# EAGLE board TeamFlag (EAGLE 7.6.0)
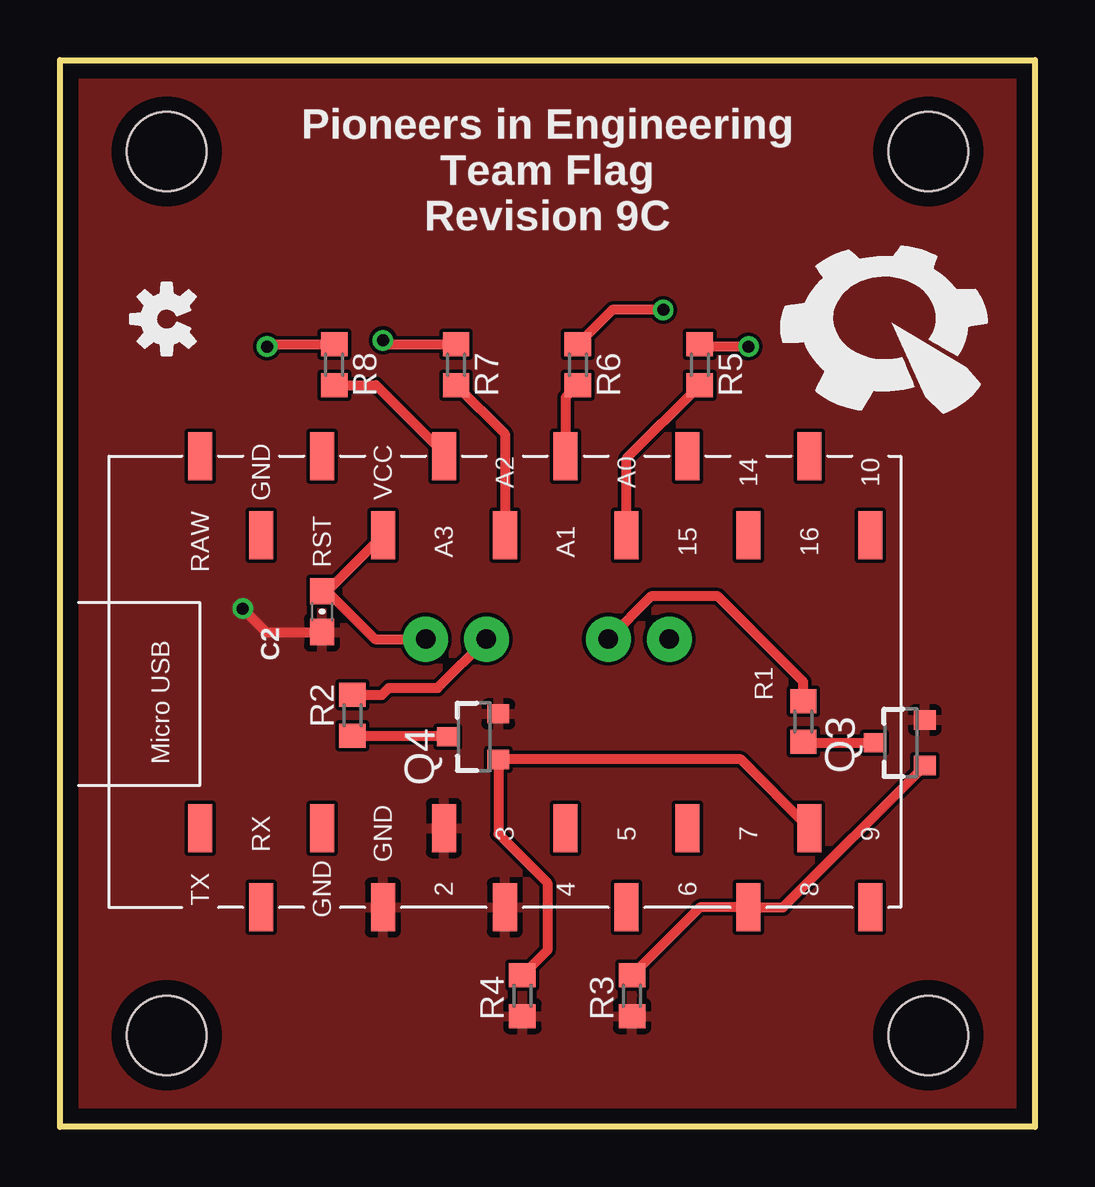
[diagram p0: board, top side]
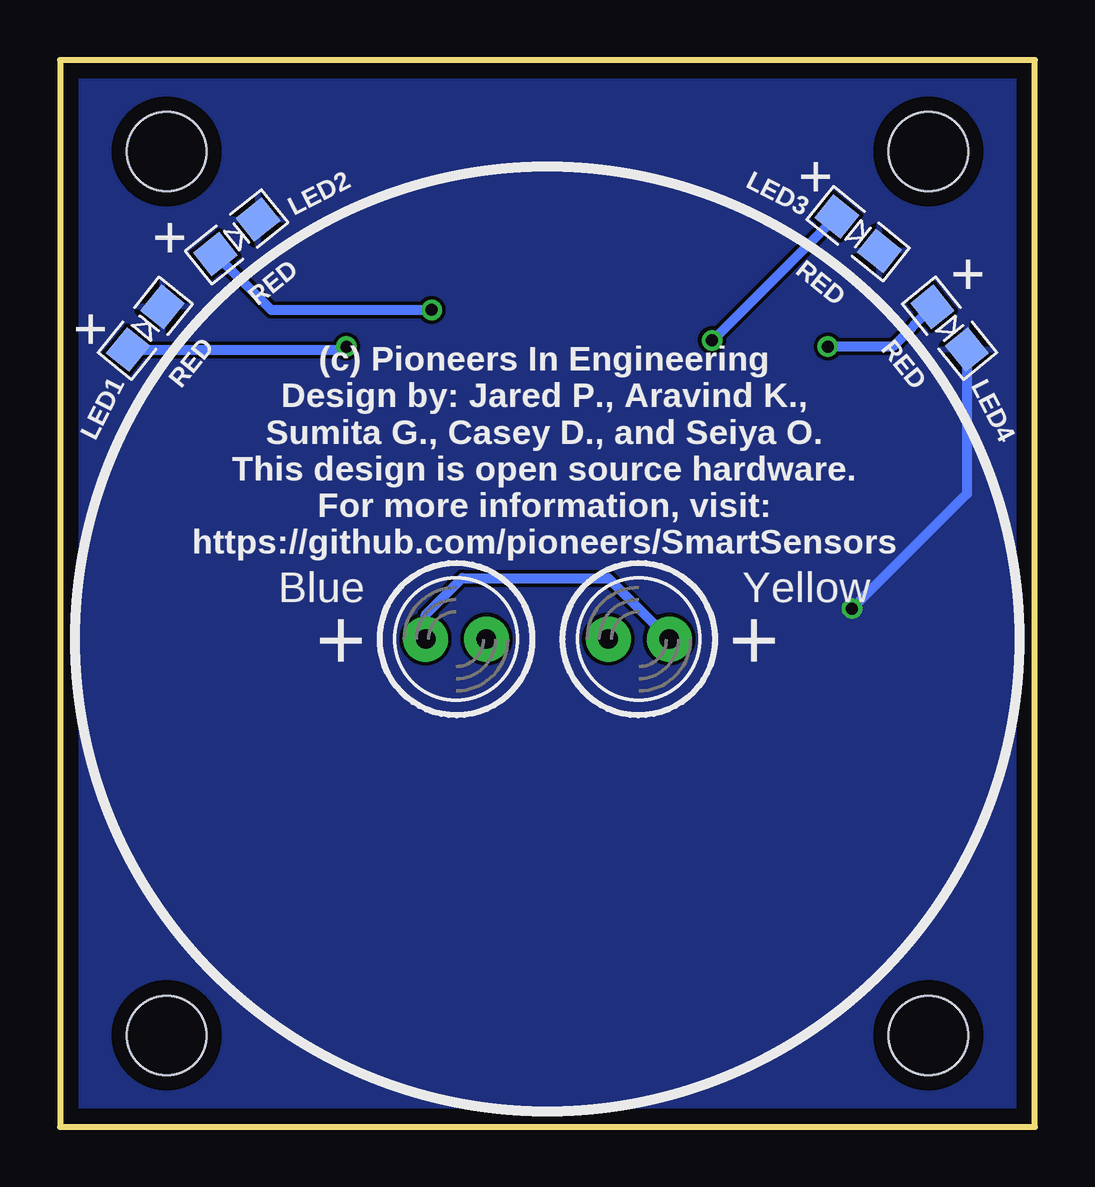
[diagram p1: board, bottom side, seen from below]

Size 40.64 x 44.45 mm. Coordinates in mm from the lower left corner, seen from the top.
Outline: 40.64,0 0,0 0,44.45 40.64,44.45 40.64,0
Copper layers (1*16): Top 2mil / dielectric 9mil / Bottom 2mil
Design rules "advancedcircuits-33each-pie": minimum track width 6mil, minimum drill 15mil, track to track 6mil, track to pad 6mil, pad to pad 6mil, via to via 6mil, smd to smd 6mil, copper to edge 25mil, drill to drill 7mil, minimum pad ring 7mil, minimum via ring 7mil, stop-mask expansion 3mil, vias tented up to drill 21mil, thermal gap 10mil

## Footprints (pad centres in the part's own frame; a part is rotated, then mirrored left to right if it is on the bottom)
0603-CAP = smd 1.1 x 1: 1 -0.85,0; 2 0.85,0
ARDUINO_PRO_MICRO_SM = smd 2 x 1: 2 3.302,19.05; 3 0,16.51; 4 3.302,13.97; 5 0,11.43; 6 3.302,8.89; 7 0,6.35; 8 3.302,3.81; 9 0,1.27; 10 15.494,1.27; 14 15.494,6.35; 15 18.796,8.89; 16 18.796,3.81; A0 15.494,11.43; A1 18.796,13.97; A2 15.494,16.51; A3 18.796,19.05; GND 15.494,26.67; GND@1 3.302,24.13; GND@2 0,21.59; RAW 18.796,29.21; RST 18.796,24.13; RX 0,26.67; TX 3.302,29.21; VCC 15.494,21.59
LED-0805 = smd 1.397 x 1.245: A -1.143,0; C 1.143,0
LED5MM-NOFLAT = drill 0.813 pad 1.88: A -1.27,0; K 1.27,0
SOT23-3 = smd 0.8 x 0.9: 1 -0.95,-1; 2 0.95,-1; 3 0,1.1
R0603 = smd 1 x 1.1: 1 -0.85,0; 2 0.85,0
STAND-OFF = hole 3.302: 0,0

## Placement (x,y rotation side)
C2  0.1 uF  [0603-CAP]  10.92,21.46 270 top
IC1  ARDUINO_PRO_MICROSMD  [ARDUINO_PRO_MICRO_SM]  35.05,9.14 90 top
LED1  RED  [LED-0805]  37.08,33.27 51 bottom
LED2  RED  [LED-0805]  33.27,37.08 39 bottom
LED3  RED  [LED-0805]  7.37,37.21 321 bottom
LED4  RED  [LED-0805]  3.56,33.27 309 bottom
LED5_  BLUE  [LED5MM-NOFLAT]  24.13,20.32 0 bottom
LED6_  YELLOW  [LED5MM-NOFLAT]  16.51,20.32 180 bottom
Q3  N-CH  [SOT23-3]  35.05,16 90 top
Q4  N-CH  [SOT23-3]  17.27,16.26 90 top
R1  200  [R0603]  30.99,16.89 90 top
R2  200  [R0603]  12.19,17.14 90 top
R3  10k  [R0603]  23.85,5.46 90 top
R4  10k  [R0603]  19.28,5.46 90 top
R5  130  [R0603]  26.67,31.75 270 top
R6  130  [R0603]  21.59,31.75 270 top
R7  130  [R0603]  16.51,31.75 270 top
R8  130  [R0603]  11.43,31.75 270 top
U$1  [PIE-LOGO-SMALL]  34.67,33.53 0 top
U$2  [OSHW-LOGO-S]  4.45,33.66 90 top
U$11  [STAND-OFF]  36.2,40.64 0 top
U$12  [STAND-OFF]  4.45,40.64 0 top
U$13  [STAND-OFF]  4.45,3.81 0 top
U$14  [STAND-OFF]  36.2,3.81 0 top

## Library data of the parts
C2 = pie; PIE-INT-REF-NUM: CAPACITOR-GENERIC
IC1 Q3 Q4 U$1 U$2 U$11-U$14 = pie
LED1-LED4 LED5_ LED6_ = pie; PIE-INT-REF-NUM: LED
R1-R8 = pie; DESCRIPTION: RESISTOR, American symbol; DISTRIBUTOR: DigiKey; MANUFACTURER: Rohm Semiconductor; NOTES: Cut Tape; PACKAGE: R0603

## Nets
5V: C2.1 IC1.VCC LED5_.A LED6_.A
BLUE(IO1): IC1.7 Q3.1 R3.2
BSOURCE: Q3.3 R1.1
GND: C2.2 IC1.2 IC1.3 IC1.GND@2 LED1.C LED2.C LED3.C LED4.C Q3.2 Q4.2 R3.1 R4.1
LED1: IC1.A0 R5.2
LED1R: LED1.A R5.1
LED2: IC1.A1 R6.2
LED2R: LED2.A R6.1
LED3: IC1.A2 R7.2
LED3R: LED3.A R7.1
LED4: IC1.A3 R8.2
LED4R: LED4.A R8.1
N$2: LED5_.K R1.2
N$3: LED6_.K R2.2
YELLOW(IO2): IC1.8 Q4.1 R4.2
YSOURCE: Q4.3 R2.1

## Tracks (layer width: path | path; a pad name or v marks a point on that pad's centre or on a via)
5V
  Top 0.406: IC1.VCC 11.14,22.31 | 11.14,22.31 C2.1 | 11.14,22.31 13.13,20.32 LED6_.A
  Bottom 0.406: 14.99,20.57 LED6_.A 17.78,22.86 23.88,22.86 25.4,21.34 LED5_.A
BLUE(IO1)
  Top 0.406: Q3.1 30.14,9.14 IC1.7 26.68,9.14 R3.2
BSOURCE
  Top 0.406: 30.95,16 R1.1 31.03,16 Q3.3
GND  (via drill 0.5)
  Top 0.406: v7.62,21.59 8.6,20.61 C2.2
  Bottom 0.406: LED4.C 2.84,26.37 v7.62,21.59
  pour Top: 0,44.45 40.64,44.45 40.64,0 0,0
  pour Bottom (rank 2): 40.64,0 0,0 0,44.45 40.64,44.45
LED1
  Top 0.406: IC1.A0 23.62,27.85 R5.2
LED1R  (via drill 0.5)
  Top 0.406: v28.7,32.51 26.76,32.51 R5.1
  Bottom 0.406: LED1.A 28.83,32.39 v28.7,32.51
LED2
  Top 0.406: R6.2 21.08,30.39 IC1.A1
LED2R  (via drill 0.5)
  Top 0.406: v25.15,34.04 23.03,34.04 R6.1
  Bottom 0.406: LED2.A 31.83,34.04 v25.15,34.04
LED3
  Top 0.406: R7.2 18.54,28.87 IC1.A2
LED3R  (via drill 0.5)
  Top 0.406: v13.46,32.77 13.63,32.6 R7.1
  Bottom 0.406: LED3.A 13.42,32.77 v13.46,32.77
LED4
  Top 0.406: R8.2 13.17,30.9 16,28.07 IC1.A3
LED4R  (via drill 0.5)
  Top 0.406: v8.64,32.51 8.72,32.6 R8.1
  Bottom 0.406: LED4.A 5.93,32.51 v8.64,32.51
N$2
  Top 0.406: LED5_.K 24.64,22.1 27.43,22.1 30.99,18.54 R1.2
N$3
  Top 0.406: R2.2 13.42,18 13.72,18.29 15.75,18.29 LED6_.K
YELLOW(IO2)
  Top 0.406: R4.2 20.32,7.35 20.32,10.16 18.27,12.21 Q4.1 28.38,15.31 IC1.8
YSOURCE
  Top 0.406: R2.1 16.17,16.3 Q4.3

## Text on the board
tPlace: Pioneers in Engineering / Team Flag / Revision 9C
bPlace: + | + | + | + | (c) Pioneers In Engineering / Design by: Jared P., Aravind K., / Sumita G., Casey D., and Seiya O. / This design is open source hardware. / For more information, visit: / https://github.com/pioneers/SmartSensors | Yellow | Blue